# Altium PCB PCB2.PcbDoc
Units mm, origin at the board's own origin, x right, y up, seen from the top; angles counter-clockwise.
Board outline 165 x 110 mm, 2 copper layers (Top Layer, Bottom Layer); 27 components, 83 nets, 300 pads, 30 vias.
Unrouted connection lines stored in the file: 156.
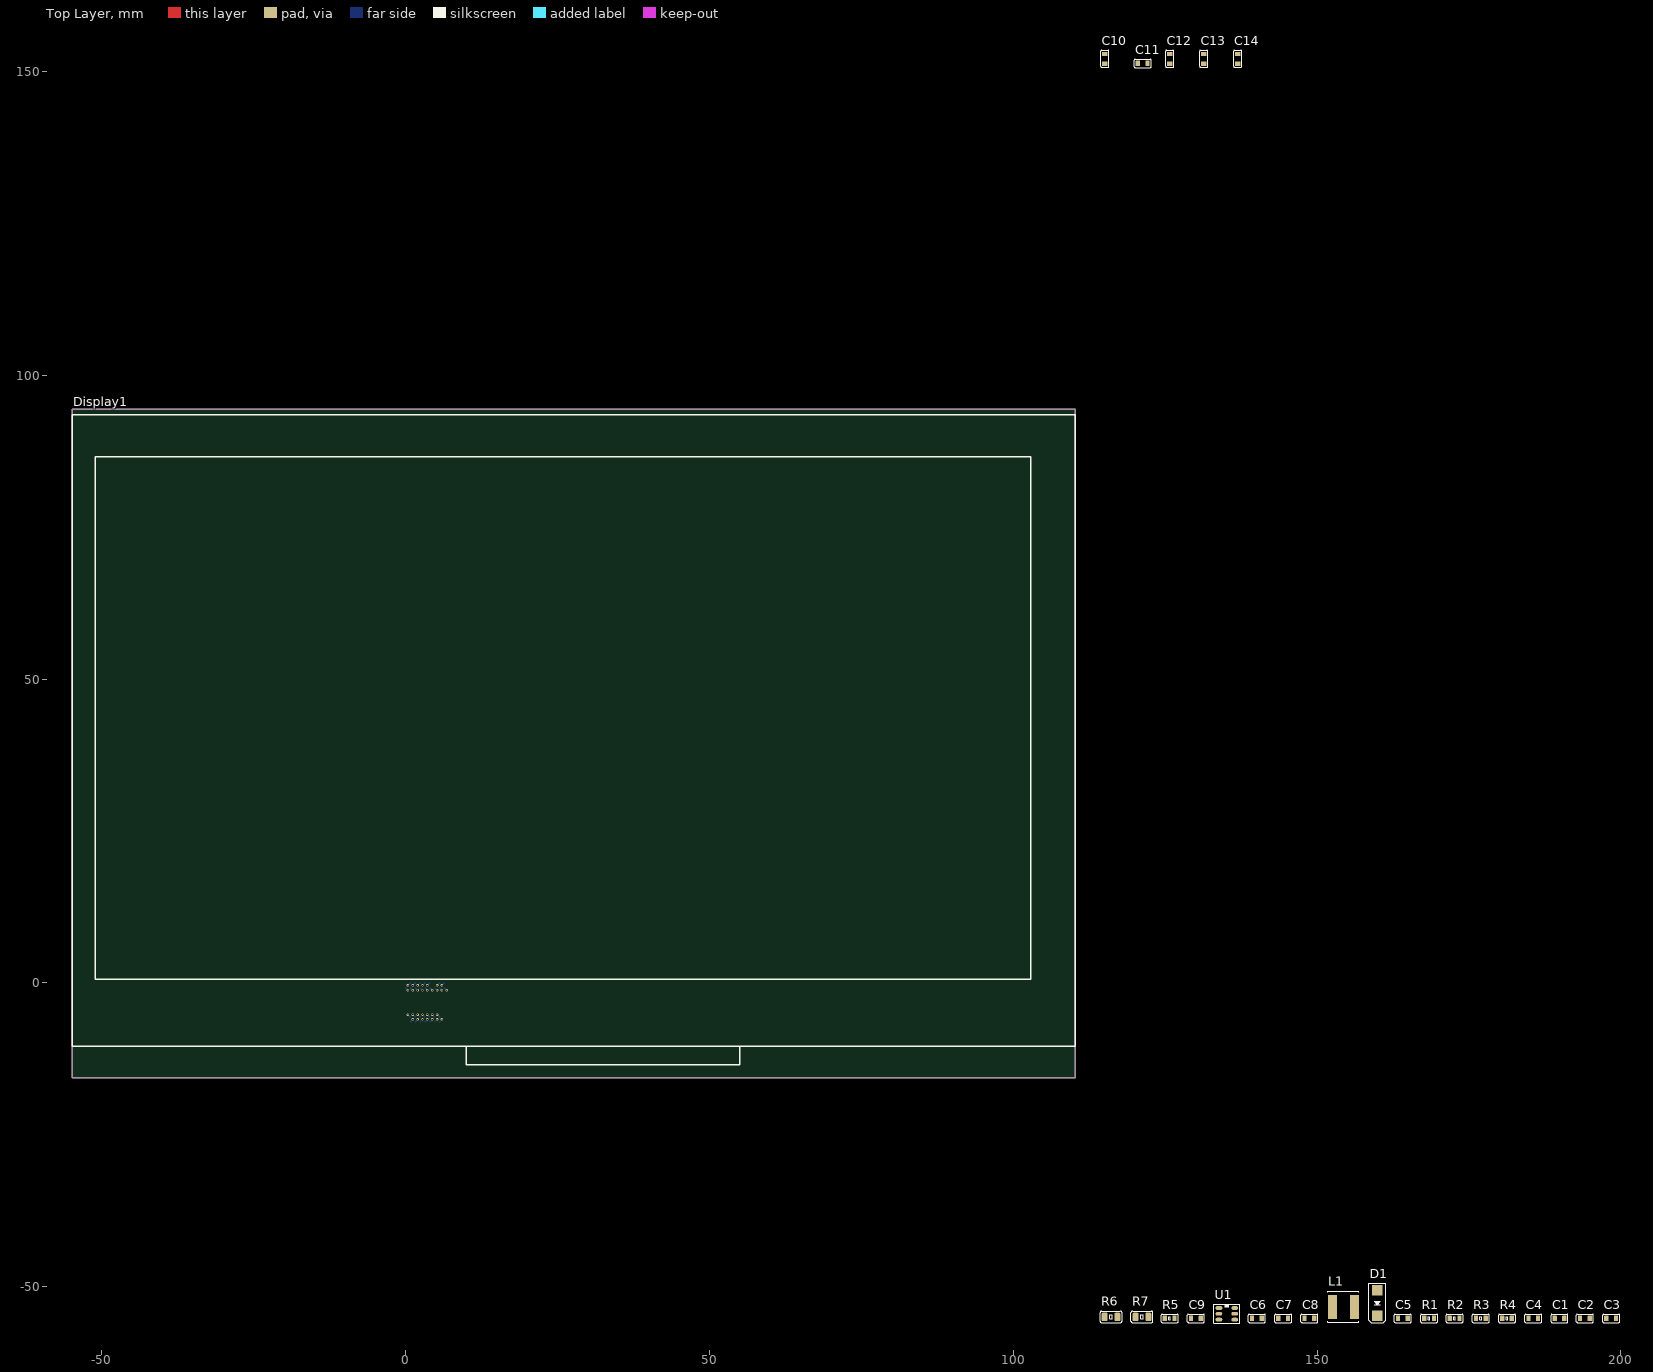
[diagram p0: Top Layer view]
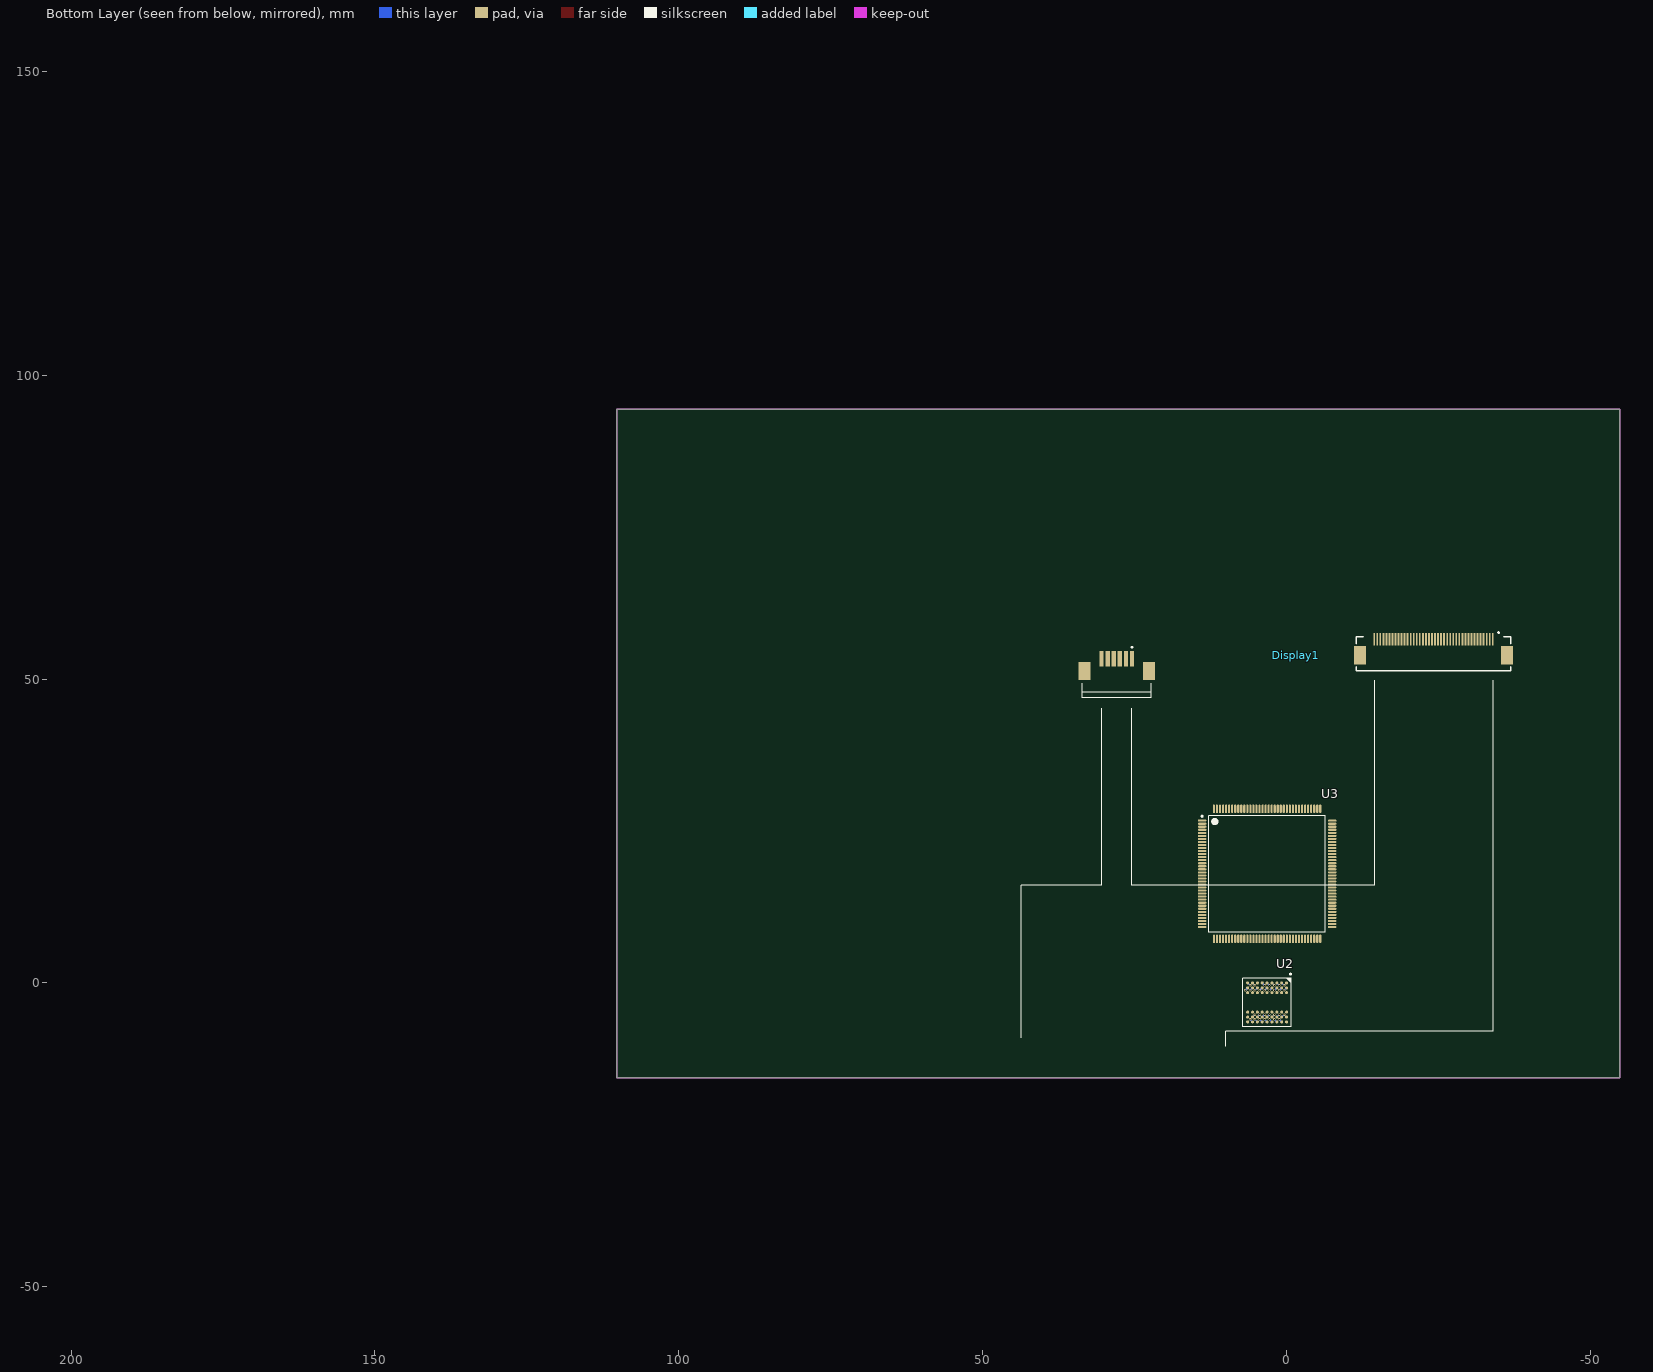
[diagram p1: Bottom Layer view, seen from below]

## Layer stack, top to bottom
Top Solder: solder mask 0.0102, Solder Resist, Dk 3.5
Top Layer: signal copper 0.0356
Dielectric 1: dielectric 0.32, FR-4, Dk 4.8
Bottom Layer: signal copper 0.0356
Bottom Solder: solder mask 0.0102, Solder Resist, Dk 3.5

## Board outline
-54.819,-15.6 -54.819,94.4 110.181,94.4 110.181,-15.6

## Design rules (kind name [scope] priority, off if disabled: settings)
Clearance [All] p1: gap=0.11 ignorepadtopadclearanceinfootprint=TRUE
PolygonConnect [All] p1: connectstyle=Relief reliefconductorwidth=0.254 reliefentries=4 polygonreliefangle="90 Angle" airgapwidth=0.254
RoutingVias [All] p1: holewidth=0.2 width=0.4 viastyle="Through Hole" minholewidth=0.2 minwidth=0.4 maxholewidth=0.4 maxwidth=0.7
SolderMaskExpansion [All] p1: expansion=0.102 istentingtop=FALSE
SupplyNets "Schematic Supply Nets_4" [InNet('+VLED')] p1: voltage=0.000
SupplyNets "Schematic Supply Nets_3" [InNet('+5')] p2: voltage=0.000
SupplyNets "Schematic Supply Nets_2" [InNet('-VLED')] p3: voltage=0.000
SupplyNets "Schematic Supply Nets_1" [InNet('GND')] p4: voltage=0.000
SupplyNets "Schematic Supply Nets" [InNet('+3P3')] p5: voltage=0.000
Width [All] p1: maxlimit=0.254 minlimit=0.254 preferedwidth=0.254
30 further rules are at their usual default settings.

## Classes and differential pairs
component class SDRAM: C10 C11 C12 C13 C14 U2
component class MCU: U3
component class LCD_TFT: C1 C2 C3 C4 C5 C6 C7 C8 C9 D1 Display1 L1 R1 R2 R3 R4 R5 R6 R7 U1

## Components (designator, comment, footprint, x,y, rotation, side; value= is the part's Value field where it differs from the comment)
C1 "100n/25V" CN-SMD-0603 189.89,-55.194 r0 top value=33pF
C2 "100n/25V" CN-SMD-0603 194.081,-55.194 r0 top value=33pF
C3 "100n/25V" CN-SMD-0603 198.399,-55.194 r0 top value=33pF
C4 "100n/25V" CN-SMD-0603 185.572,-55.194 r0 top value=33pF
C5 "100n/25V" CN-SMD-0603 164.109,-55.194 r0 top value=33pF
C6 "10u/25V" CN-SMD-0603 140.106,-55.194 r0 top value=33pF
C7 "10u/25V" CN-SMD-0603 144.424,-55.194 r0 top value=33pF
C8 "100n/25V" CN-SMD-0603 148.742,-55.194 r0 top value=33pF
C9 "10u/25V" CN-SMD-0603 130.073,-55.194 r0 top value=33pF
C10 "100n/25V" CN-SMD-0603 115.087,152.07 r90 top value=33pF
C11 "100n/25V" CN-SMD-0603 121.31,151.308 r0 top value=33pF
C12 "100n/25V" CN-SMD-0603 125.755,152.07 r90 top value=33pF
C13 "100n/25V" CN-SMD-0603 131.343,152.07 r90 top value=33pF
C14 "100n/25V" CN-SMD-0603 136.931,152.07 r90 top value=33pF
D1 "SK34A" DIO-SMD-A 159.918,-52.654 r90 top value=1N5007
Display1 "NHD-7.0-800480EF-ATXL#-CTP" NHD-7.0-800480EF-ATXL#-CTP -54.819,-10.433 r0 top locked
L1 "10 μH" L-SMD-M-5x5 154.33,-53.289 r0 top
R1 "10K/1%" RES-SMD-0603 168.427,-55.194 r0 top
R2 "10K/1%" RES-SMD-0603 172.618,-55.194 r0 top
R3 "10K/1%" RES-SMD-0603 176.936,-55.194 r0 top
R4 "10K/1%" RES-SMD-0603 181.254,-55.194 r0 top
R5 "470R/1%" RES-SMD-0603 125.755,-55.194 r0 top
R6 "2.2R" RES-SMD-0805 116.103,-54.94 r0 top
R7 "8.2R" RES-SMD-0805 121.183,-54.94 r0 top
U1 "MP3202DJ-LF-Z" SOT23-6 135.153,-54.432 r0 top
U2 "IS42S16400N-7BLI" BGA54C80P9X6_800X800X120 3.2,-3.2 r270 bottom
U3 "STM32F767ZIT6" LQFP144 3.2,17.958 r180 bottom

## Footprints (in the part's own frame and the unit in brackets; to place one, negate y for a bottom-side part, rotate by r counter-clockwise, add the part's x,y. Pads: shape width x height; smd on the part's side, far side on the other; paste and mask are expansions set on the pad)
BGA54C80P9X6_800X800X120 [mm] "BGA, 54-Leads, Body 8.00x8.00mmx1.20mm, Pitch 0.80mm"
  round 0.5 smd: A1(-3.2,3.2) A2(-2.4,3.2) A3(-1.6,3.2) A7(1.6,3.2) A8(2.4,3.2) A9(3.2,3.2) B1(-3.2,2.4) B2(-2.4,2.4) B3(-1.6,2.4) B7(1.6,2.4) B8(2.4,2.4) B9(3.2,2.4) C1(-3.2,1.6) C2(-2.4,1.6) C3(-1.6,1.6) C7(1.6,1.6) C8(2.4,1.6) C9(3.2,1.6) D1(-3.2,0.8) D2(-2.4,0.8) D3(-1.6,0.8) D7(1.6,0.8) D8(2.4,0.8) D9(3.2,0.8) E1(-3.2,0) E2(-2.4,0) E3(-1.6,0) E7(1.6,0) E8(2.4,0) E9(3.2,0) F1(-3.2,-0.8) F2(-2.4,-0.8) F3(-1.6,-0.8) F7(1.6,-0.8) F8(2.4,-0.8) F9(3.2,-0.8) G1(-3.2,-1.6) G2(-2.4,-1.6) G3(-1.6,-1.6) G7(1.6,-1.6) G8(2.4,-1.6) G9(3.2,-1.6) H1(-3.2,-2.4) H2(-2.4,-2.4) H3(-1.6,-2.4) H7(1.6,-2.4) H8(2.4,-2.4) H9(3.2,-2.4) J1(-3.2,-3.2) J2(-2.4,-3.2) J3(-1.6,-3.2) J7(1.6,-3.2) J8(2.4,-3.2) J9(3.2,-3.2)
  silkscreen extent -4.77,-4 4,4, body extent -4,-4 4,4, height 0.59
CN-SMD-0603 [mm]
  rrect10% 0.7x0.9 smd: 1(-0.8,0) 2(0.8,0)
  silkscreen extent -1.4,-0.67 1.4,0.68, body extent -0.8,-0.4 0.8,0.4, height 0.3
DIO-SMD-A [mm]
  rect 1.7x1.7 smd: 1(2.1,0) 2(-2.1,0)
  silkscreen extent -3.25,-1.4 3.25,1.4, body extent -2.6,-1.3 2.6,1.3, height 2.4
L-SMD-M-5x5 [mm]
  rect 1.5x4 smd paste+0 mask+0: 1(-1.8,-0.011) 2(1.8,-0.011)
  silkscreen extent -2.55,-2.56 2.55,2.54, body extent -2.65,-2.66 2.65,2.64, height 0.25
LQFP144 [mm] "LQFP, 144-Leads, Body 20.00x20.00mm, Pitch 0.50mm, IPC Medium Density"
  oval 1.4x0.35 smd: 1(-10.7,8.75) 2(-10.7,8.25) 3(-10.7,7.75) 4(-10.7,7.25) 5(-10.7,6.75) 6(-10.7,6.25) 7(-10.7,5.75) 8(-10.7,5.25) 9(-10.7,4.75) 10(-10.7,4.25) 11(-10.7,3.75) 12(-10.7,3.25) 13(-10.7,2.75) 14(-10.7,2.25) 15(-10.7,1.75) 16(-10.7,1.25) 17(-10.7,0.75) 18(-10.7,0.25) 19(-10.7,-0.25) 20(-10.7,-0.75) 21(-10.7,-1.25) 22(-10.7,-1.75) 23(-10.7,-2.25) 24(-10.7,-2.75) 25(-10.7,-3.25) 26(-10.7,-3.75) 27(-10.7,-4.25) 28(-10.7,-4.75) 29(-10.7,-5.25) 30(-10.7,-5.75) 31(-10.7,-6.25) 32(-10.7,-6.75) 33(-10.7,-7.25) 34(-10.7,-7.75) 35(-10.7,-8.25) 36(-10.7,-8.75) 73(10.7,-8.75) 74(10.7,-8.25) 75(10.7,-7.75) 76(10.7,-7.25) 77(10.7,-6.75) 78(10.7,-6.25) 79(10.7,-5.75) 80(10.7,-5.25) 81(10.7,-4.75) 82(10.7,-4.25) 83(10.7,-3.75) 84(10.7,-3.25) 85(10.7,-2.75) 86(10.7,-2.25) 87(10.7,-1.75) 88(10.7,-1.25) 89(10.7,-0.75) 90(10.7,-0.25) 91(10.7,0.25) 92(10.7,0.75) 93(10.7,1.25) 94(10.7,1.75) 95(10.7,2.25) 96(10.7,2.75) 97(10.7,3.25) 98(10.7,3.75) 99(10.7,4.25) 100(10.7,4.75) 101(10.7,5.25) 102(10.7,5.75) 103(10.7,6.25) 104(10.7,6.75) 105(10.7,7.25) 106(10.7,7.75) 107(10.7,8.25) 108(10.7,8.75)
  oval 0.35x1.4 smd: 37(-8.75,-10.7) 38(-8.25,-10.7) 39(-7.75,-10.7) 40(-7.25,-10.7) 41(-6.75,-10.7) 42(-6.25,-10.7) 43(-5.75,-10.7) 44(-5.25,-10.7) 45(-4.75,-10.7) 46(-4.25,-10.7) 47(-3.75,-10.7) 48(-3.25,-10.7) 49(-2.75,-10.7) 50(-2.25,-10.7) 51(-1.75,-10.7) 52(-1.25,-10.7) 53(-0.75,-10.7) 54(-0.25,-10.7) 55(0.25,-10.7) 56(0.75,-10.7) 57(1.25,-10.7) 58(1.75,-10.7) 59(2.25,-10.7) 60(2.75,-10.7) 61(3.25,-10.7) 62(3.75,-10.7) 63(4.25,-10.7) 64(4.75,-10.7) 65(5.25,-10.7) 66(5.75,-10.7) 67(6.25,-10.7) 68(6.75,-10.7) 69(7.25,-10.7) 70(7.75,-10.7) 71(8.25,-10.7) 72(8.75,-10.7) 109(8.75,10.7) 110(8.25,10.7) 111(7.75,10.7) 112(7.25,10.7) 113(6.75,10.7) 114(6.25,10.7) 115(5.75,10.7) 116(5.25,10.7) 117(4.75,10.7) 118(4.25,10.7) 119(3.75,10.7) 120(3.25,10.7) 121(2.75,10.7) 122(2.25,10.7) 123(1.75,10.7) 124(1.25,10.7) 125(0.75,10.7) 126(0.25,10.7) 127(-0.25,10.7) 128(-0.75,10.7) 129(-1.25,10.7) 130(-1.75,10.7) 131(-2.25,10.7) 132(-2.75,10.7) 133(-3.25,10.7) 134(-3.75,10.7) 135(-4.25,10.7) 136(-4.75,10.7) 137(-5.25,10.7) 138(-5.75,10.7) 139(-6.25,10.7) 140(-6.75,10.7) 141(-7.25,10.7) 142(-7.75,10.7) 143(-8.25,10.7) 144(-8.75,10.7)
  silkscreen extent -10.82,-9.6 9.6,9.6, body extent -11,-11 11,11, height 1.6
NHD-7.0-800480EF-ATXL#-CTP [mm]
  rect 2x3 smd far side: 0(18.55,64.375) 0(42.73,64.375) 0(77.45,61.788) 0(88.05,61.788)
  rect 0.3x2 smd far side: 1(20.89,67) 2(21.39,67) 3(21.89,67) 4(22.39,67) 5(22.89,67) 6(23.39,67) 7(23.89,67) 8(24.39,67) 9(24.89,67) 10(25.39,67) 11(25.89,67) 12(26.39,67) 13(26.89,67) 14(27.39,67) 15(27.89,67) 16(28.39,67) 17(28.89,67) 18(29.39,67) 19(29.89,67) 20(30.39,67) 21(30.89,67) 22(31.39,67) 23(31.89,67) 24(32.39,67) 25(32.89,67) 26(33.39,67) 27(33.89,67) 28(34.39,67) 29(34.89,67) 30(35.39,67) 31(35.89,67) 32(36.39,67) 33(36.89,67) 34(37.39,67) 35(37.89,67) 36(38.39,67) 37(38.89,67) 38(39.39,67) 39(39.89,67) 40(40.39,67)
  rect 0.7x2.5 smd far side: 41(80.25,63.788) 42(81.25,63.788) 43(82.25,63.788) 44(83.25,63.788) 45(84.25,63.788) 46(85.25,63.788)
  silkscreen extent 0,-3 165,103.95, body extent 0,-71.05 165,103.95, height 6.08
RES-SMD-0603 [mm]
  rrect10% 0.7x0.9 smd: 1(-0.8,0) 2(0.8,0)
  silkscreen extent -1.4,-0.67 1.4,0.68, body extent -0.8,-0.4 0.8,0.4, height 0.43
RES-SMD-0805 [mm]
  rrect50% 1x1.397 smd: 1(-1.05,0) 2(1.05,0)
  silkscreen extent -1.8,-0.95 1.8,0.95, body extent -1,-0.62 1,0.63, height 0.8
SOT23-6 [mm]
  oct 1.1x0.6 smd: 1(-1.3,0.95)
  oval 1.1x0.6 smd: 2(-1.3,0) 3(-1.3,-0.95) 4(1.3,-0.95) 5(1.3,0) 6(1.3,0.95)
  silkscreen extent -2.16,-1.59 2.16,1.59, body extent -1.51,-1.5 1.49,1.5, height 1.3

## Part data
C1 C2 C3 C4 C5 C8 C10 C11 C12 C13 C14: library part CN, "CL10B104KA8NNNC"
C6 C7 C9: library part CN, "0603W106M250XD"
D1: library part "Diode SMD", Code - JEDEC=DO-214-AB, Published=8-Jun-2000, Publisher="Altium Limited", Revision="July-2002: Re-released for DXP Platform."
Display1: "TFT (Thin-Film-Transistor) Color Liquid Crystal Display Module, 0541044031 + 52271-0679"
L1: library part L-SMD-1, "NRS5024T100MMGJ", Manufacturer="Wurth Elektronik", partNo=78477010, ComponentLink1Description=Manufacturer, ComponentLink1URL=http://www.we-online.de, ComponentLink2Description=Datasheet, ComponentLink2URL=http://katalog.we-online.de/pbs/datasheet/78477010.pdf, Created by="Baojun Chen", Created Date=Nov.2015, Inductance="10 μH"
R1 R2 R3 R4: library part Res-SMD, "ERJ-3EKF1002V", Manufacturer="Generic Components", Class=Passive, Published=08/06/2000, Publisher="Altium Hobart Technology Centre"
R5: library part Res-SMD, "ERJ-1GJF4700C", Manufacturer="Generic Components", Class=Passive, Published=08/06/2000, Publisher="Altium Hobart Technology Centre"
R6 R7: library part Res-SMD, "Resistor", Manufacturer="Generic Components", Class=Passive, Published=08/06/2000, Publisher="Altium Hobart Technology Centre"
U1: library part MP3202, "1.3A Fixed Frequency White LED Driver"
U2: "1 Meg Bits x 16 Bits x 4 Banks (64-MBIT) SYNCHRONOUS DYNAMIC RAM"
U3: "High-performance MCU based on Cortex-M7 core with DSP and double-precision FPU, up to 216 MHz CPU, up to 2 MB Flash, ART Accelerator and L1 cache for zero-wait execution."

## Via types
v1: diameter 0.4, hole 0.2, Top Layer to Bottom Layer, tented both sides, 30 vias

## Nets (pads, with @x,y where several pads share a name; then routed paths per layer and width w, separated by ;. In a path a pad name is that pad's centre, name@x,y a point inside that pad or via, vN(x,y) a via of type N, cw(c..) or ccw(c..) an arc to the next point about the centre after c; other vN are vias at no path point)
+3P3: C1.2 C2.2 C3.2 C4.2 C5.2 C10.2 C11.2 C12.2 C13.2 C14.2 Display1.4 Display1.41 R1.1 R2.1 R3.1 R4.1 U2.A7 U2.A9 U2.B3 U2.C7 U2.D3 U2.E7 U2.J9 U3.17 U3.30 U3.39 U3.52 U3.62 U3.72 U3.84 U3.108 U3.131 U3.144
+5: C6.2 C7.2 C8.2 L1.1 U1.6
+VLED: C9.2 D1.2 Display1.2 U1.5
-VLED: Display1.1 R6.2 R7.2 U1.3
FMC_A0: U2.H7 U3.10
FMC_A1: U2.H8 U3.11 | length 0.6
  Bottom Layer w0.254: v1(5.2,-5.2) U2.H8
FMC_A2: U2.J8 U3.12
FMC_A3: U2.J7 U3.13
FMC_A4: U2.J3 U3.14
FMC_A5: U2.J2 U3.15 | length 0.6
  Bottom Layer w0.254: U2.J2 v1(6.8,-1.2)
FMC_A6: U2.H3 U3.50
FMC_A7: U2.H2 U3.53 | length 0.6
  Bottom Layer w0.254: U2.H2 v1(6,-1.2)
FMC_A8: U2.H1 U3.54 | length 0.6
  Bottom Layer w0.254: v1(5.2,-0.4) U2.H1
FMC_A9: U2.G3 U3.55
FMC_A10: U2.H9 U3.56 | length 0.6
  Bottom Layer w0.254: U2.H9 v1(6,-6)
FMC_A11: U2.G2 U3.57 | length 0.6
  Bottom Layer w0.254: U2.G2 v1(5.2,-1.2)
FMC_BA0: U2.G7 U3.89
FMC_BA1: U2.G8 U3.90 | length 0.6
  Bottom Layer w0.254: v1(4.4,-5.2) U2.G8
FMC_CAS: U2.F7 U3.132
FMC_CLE: U2.F3 U3.29
FMC_CLK: U2.F2 U3.93 | length 0.6
  Bottom Layer w0.254: U2.F2 v1(4.4,-1.2)
FMC_D0: U2.A8 U3.85
FMC_D1: U2.B9 U3.86 | length 0.6
  Bottom Layer w0.254: U2.B9 v1(1.2,-6)
FMC_D2: U2.B8 U3.114 | length 0.6
  Bottom Layer w0.254: v1(0.4,-5.2) U2.B8
FMC_D3: U2.C9 U3.115 | length 0.6
  Bottom Layer w0.254: U2.C9 v1(2,-6)
FMC_D4: U2.C8 U3.58 | length 0.6
  Bottom Layer w0.254: v1(1.2,-5.2) U2.C8
FMC_D5: U2.D9 U3.59 | length 0.6
  Bottom Layer w0.254: U2.D9 v1(2.8,-6)
FMC_D6: U2.D8 U3.60 | length 0.6
  Bottom Layer w0.254: v1(2,-5.2) U2.D8
FMC_D7: U2.E9 U3.63 | length 0.6
  Bottom Layer w0.254: U2.E9 v1(3.6,-6)
FMC_D8: U2.E1 U3.64 | length 0.6
  Bottom Layer w0.254: v1(2.8,-0.4) U2.E1
FMC_D9: U2.D2 U3.65 | length 0.6
  Bottom Layer w0.254: U2.D2 v1(2.8,-1.2)
FMC_D10: U2.D1 U3.66 | length 0.6
  Bottom Layer w0.254: v1(2,-0.4) U2.D1
FMC_D11: U2.C2 U3.67 | length 0.6
  Bottom Layer w0.254: U2.C2 v1(2,-1.2)
FMC_D12: U2.C1 U3.68 | length 0.6
  Bottom Layer w0.254: v1(1.2,-0.4) U2.C1
FMC_D13: U2.B2 U3.77 | length 0.6
  Bottom Layer w0.254: U2.B2 v1(1.2,-1.2)
FMC_D14: U2.B1 U3.78 | length 0.6
  Bottom Layer w0.254: v1(0.4,-0.4) U2.B1
FMC_D15: U2.A2 U3.79 | length 0.6
  Bottom Layer w0.254: U2.A2 v1(0.4,-1.2)
FMC_NBL0: U2.E8 U3.141 | length 0.6
  Bottom Layer w0.254: v1(2.8,-5.2) U2.E8
FMC_NBL1: U2.F1 U3.142 | length 0.6
  Bottom Layer w0.254: v1(3.6,-0.4) U2.F1
FMC_RAS: U2.F8 U3.49 | length 0.6
  Bottom Layer w0.254: v1(3.6,-5.2) U2.F8
FMC_SDNE: U2.G9 U3.28 | length 0.6
  Bottom Layer w0.254: U2.G9 v1(5.2,-6)
FMC_WE: U2.F9 U3.26 | length 0.6
  Bottom Layer w0.254: U2.F9 v1(4.4,-6)
GND: C1.1 C2.1 C3.1 C4.1 C5.1 C6.1 C7.1 C8.1 C9.1 C10.1 C11.1 C12.1 C13.1 C14.1 Display1.3 Display1.29 Display1.36 Display1.42 R6.1 R7.1 U1.2 U2.A1 U2.A3 U2.B7 U2.C3 U2.D7 U2.E3 U2.J1 U3.16 U3.38 U3.51 U3.61 U3.83 U3.94 U3.107 U3.120 U3.130 | length 0.6
  Bottom Layer w0.254: v1(6,-0.4) U2.J1
LED_PWM: R5.1 U3.43
LTDC_B0: Display1.21 U3.3
LTDC_B1: Display1.22 U3.127
LTDC_B2: Display1.23 U3.125
LTDC_B3: Display1.24 U3.100
LTDC_B4: Display1.25 U3.102
LTDC_B5: Display1.26 U3.37
LTDC_B6: Display1.27 U3.139
LTDC_B7: Display1.28 U3.140
LTDC_CLK: Display1.30 U3.92
LTDC_DE: Display1.34 U3.22
LTDC_G0: Display1.13 U3.4
LTDC_G1: Display1.14 U3.5
LTDC_G2: Display1.15 U3.42
LTDC_G3: Display1.16 U3.99
LTDC_G4: Display1.17 U3.69
LTDC_G5: Display1.18 U3.70
LTDC_G6: Display1.19 U3.97
LTDC_G7: Display1.20 U3.117
LTDC_HS: Display1.32 U3.96
LTDC_R0: Display1.5 U3.128
LTDC_R1: Display1.6 U3.36
LTDC_R2: Display1.7 U3.35
LTDC_R3: Display1.8 U3.46
LTDC_R4: Display1.9 U3.41
LTDC_R5: Display1.10 U3.101
LTDC_R6: Display1.11 U3.47
LTDC_R7: Display1.12 U3.91
LTDC_VS: Display1.33 U3.40
NetD1_1: D1.1 L1.2 U1.1
NetR5_2: R5.2 U1.4
TFT_EN: Display1.31
TOUCH_INT: Display1.45 R3.2 U3.134
TOUCH_RST: Display1.46 R4.2 U3.135
TOUCH_SCL: Display1.43 R1.2 U3.136
TOUCH_SDA: Display1.44 R2.2 U3.137
USART1_RX: U3.76
USART1_TX: U3.75
USB_DN: U3.103
USB_DP: U3.104
pads on no net: Display1.0 Display1.35 Display1.37 Display1.38 Display1.39 Display1.40 U2.E2 U2.G1 U3.1 U3.2 U3.6 U3.7 U3.8 U3.9 U3.18 U3.19 U3.20 U3.21 U3.23 U3.24 U3.25 U3.27 U3.31 U3.32 U3.33 U3.34 U3.44 U3.45 U3.48 U3.71 U3.73 U3.74 U3.80 U3.81 U3.82 U3.87 U3.88 U3.95 U3.98 U3.105 U3.106 U3.109 U3.110 U3.111 U3.112 U3.113 U3.116 U3.118 U3.119 U3.121 U3.122 U3.123 U3.124 U3.126 U3.129 U3.133 U3.138 U3.143
copper on no net: | length 0.6
  Bottom Layer w0.254: 3.2,-0.8 v1(3.6,-1.2)

## Keep-outs
Keep-Out Layer:
  the board outline again, w0.25